# Altium PCB DEV-5V-Outside-Pump_2024-03-23.pcbdoc
Units mil, origin at the board's own origin, x right, y up, seen from the top; angles counter-clockwise.
Board outline 4264.35 x 3965 mil, 2 copper layers (Top Layer, Bottom Layer); 65 components, 44 nets, 268 pads, 44 vias.
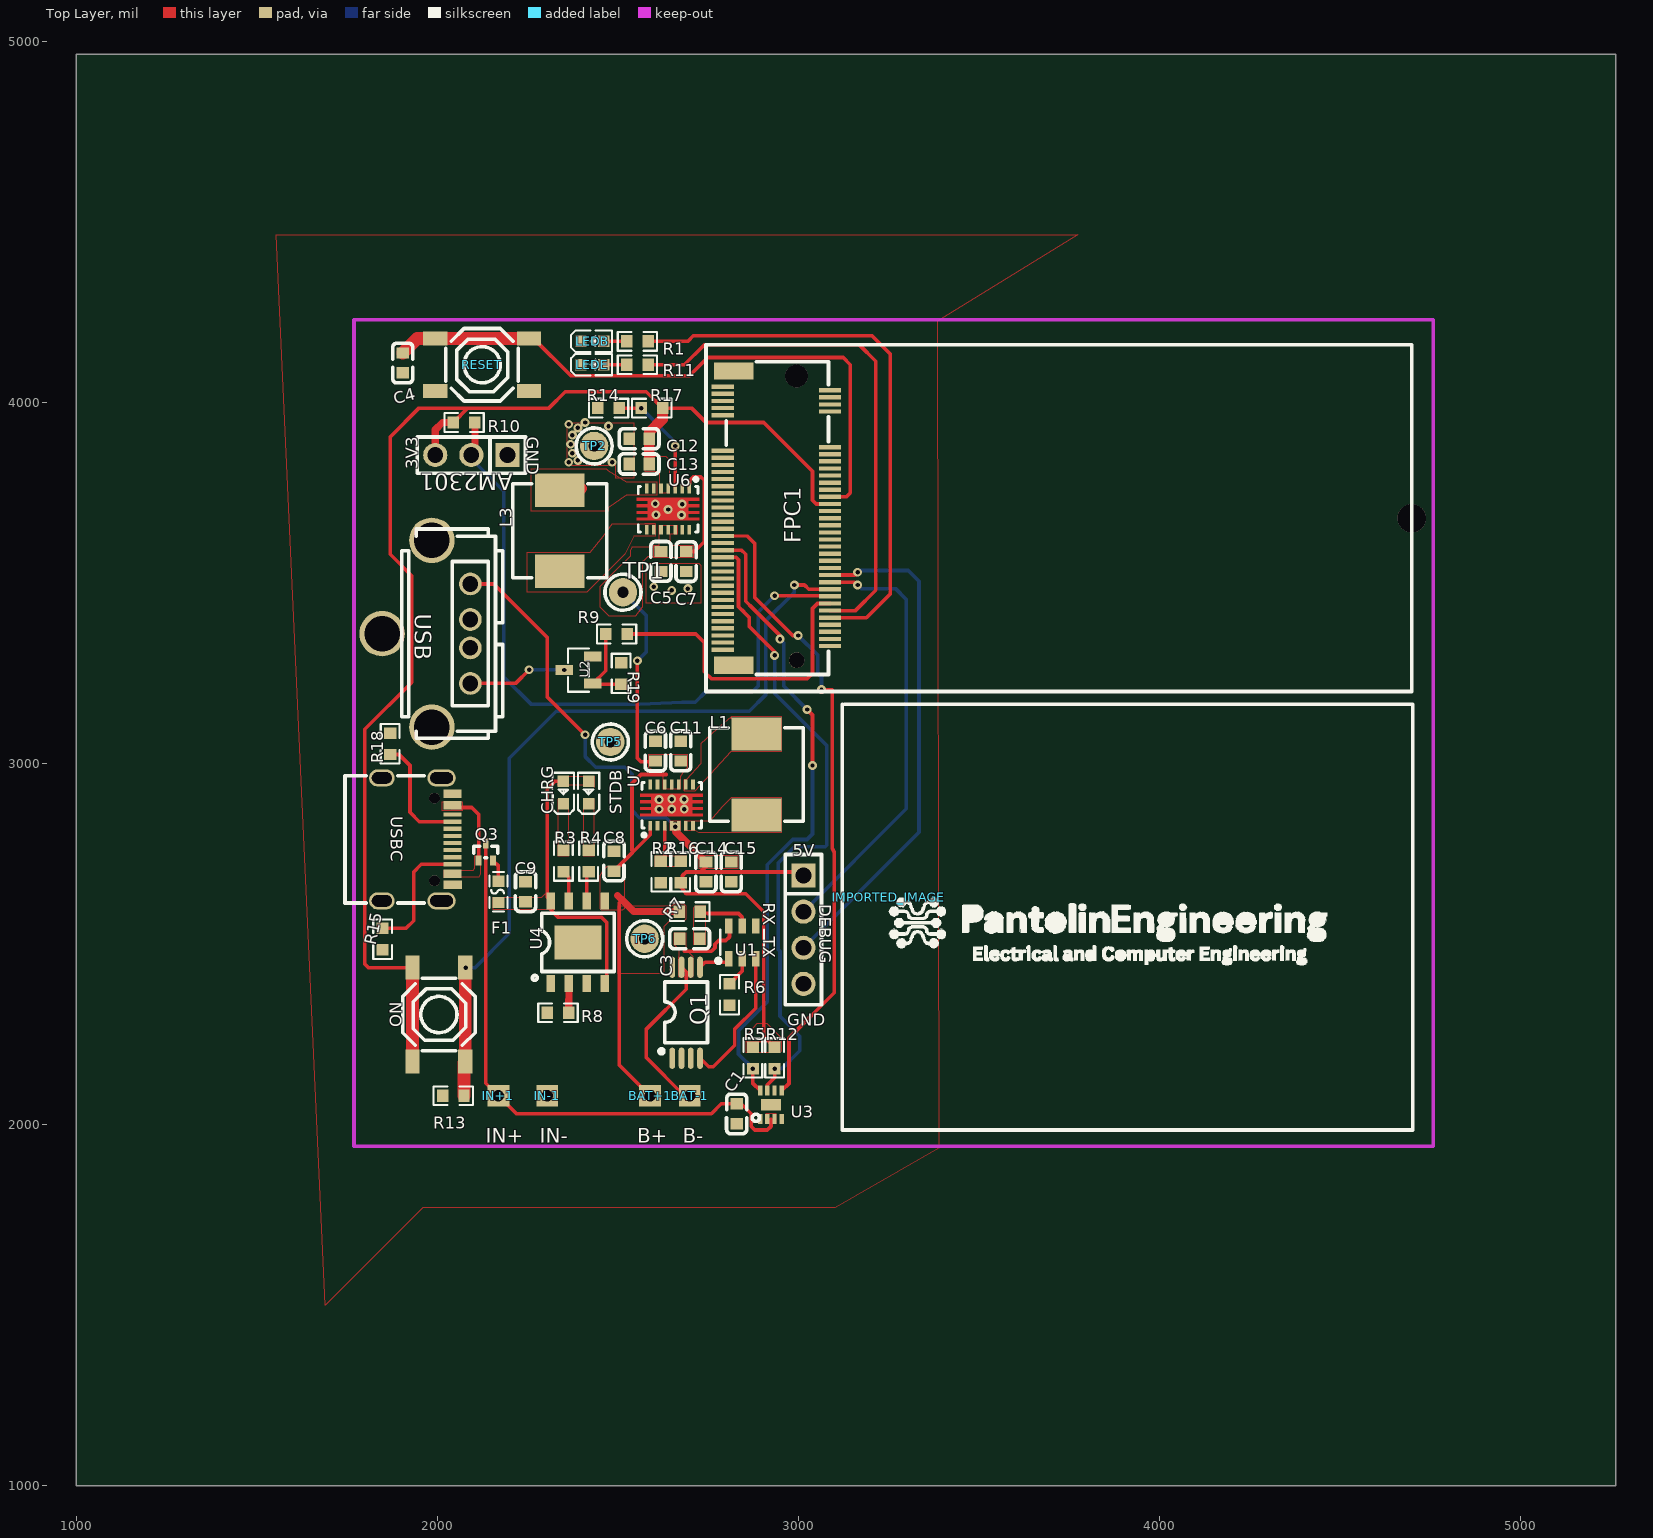
[diagram p0: Top Layer view]
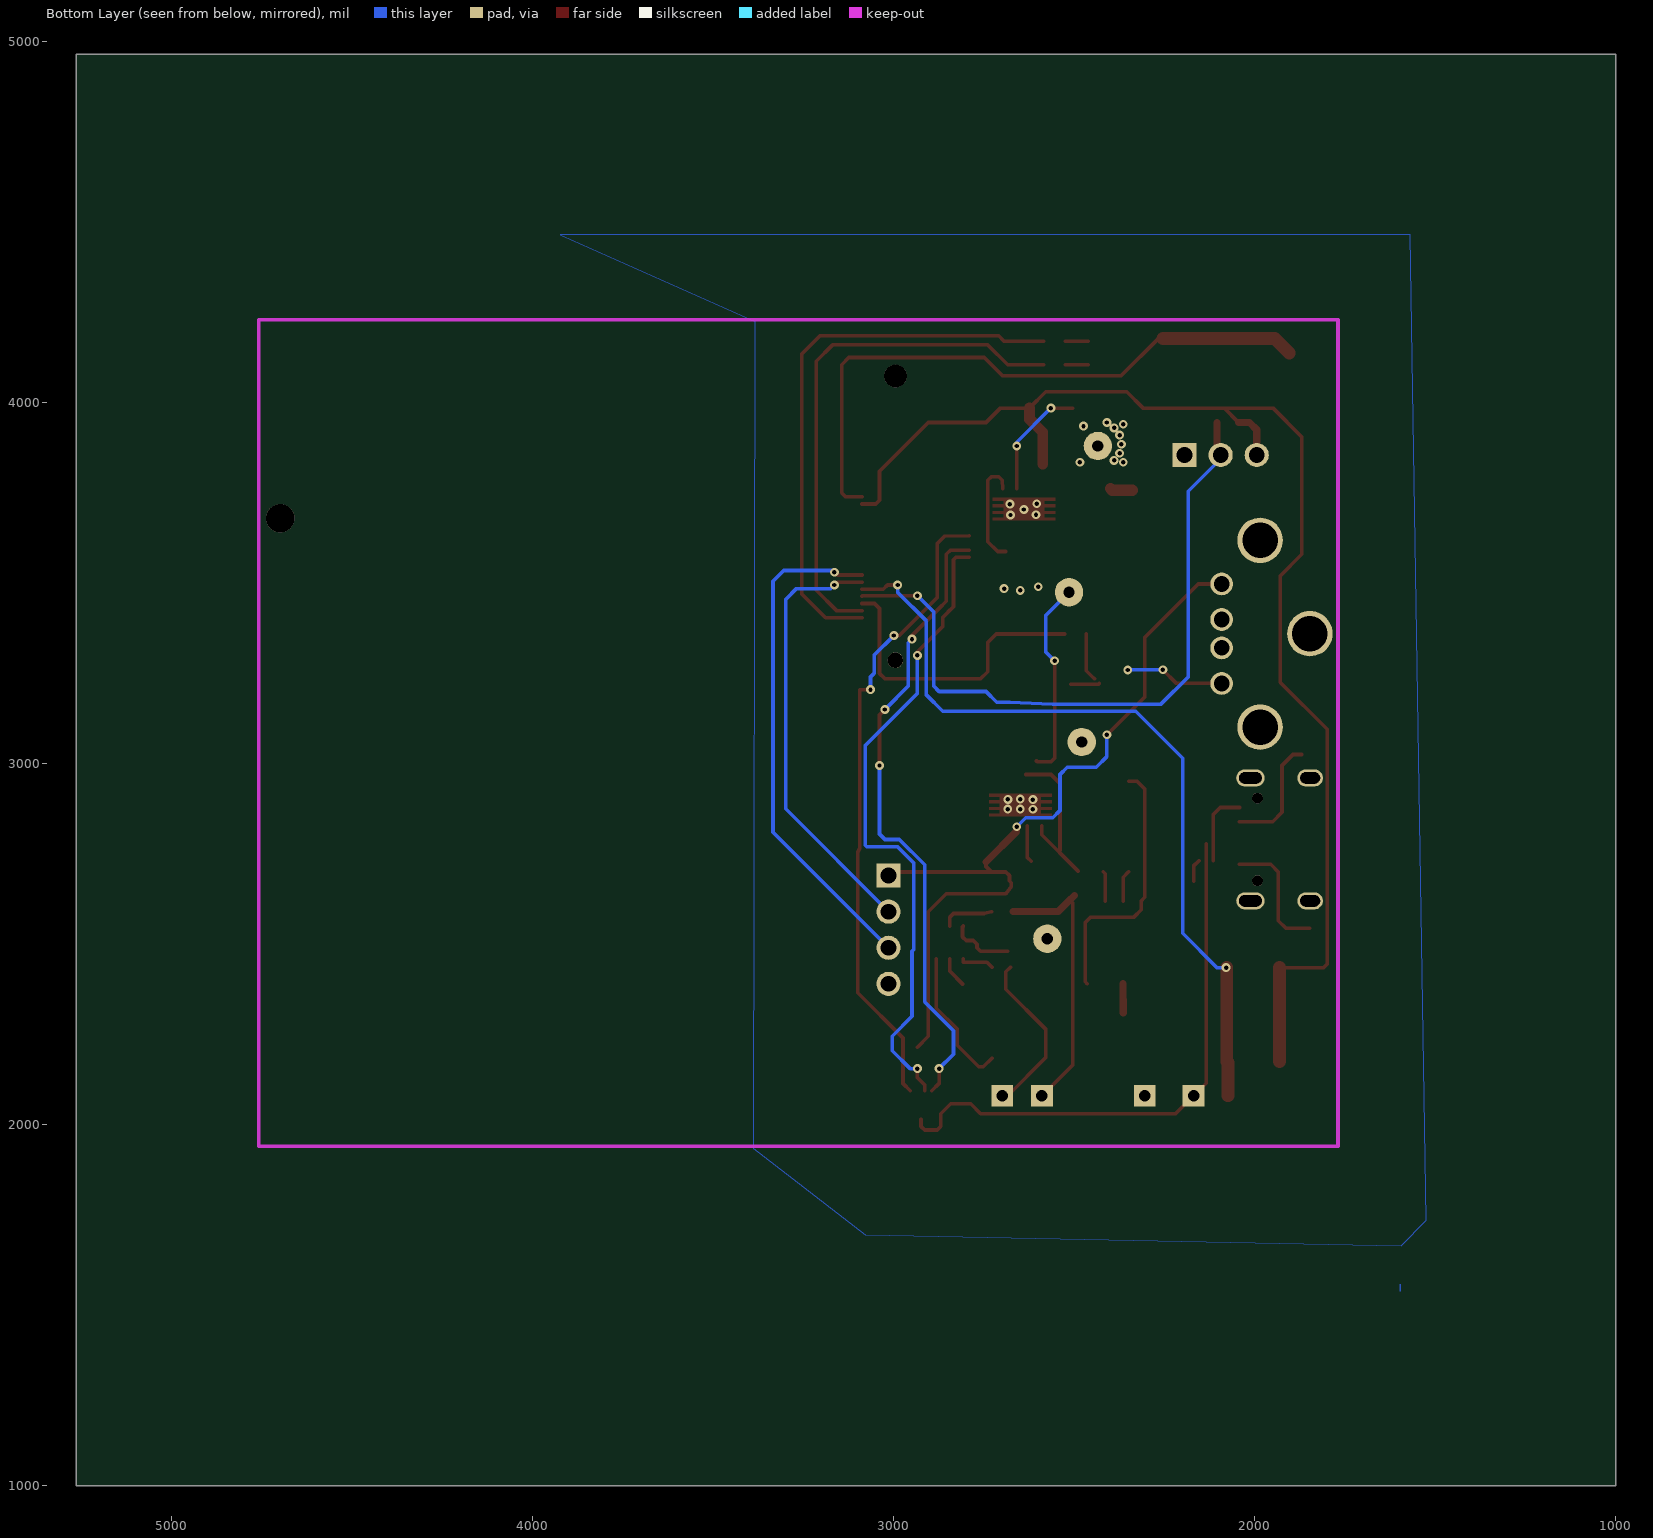
[diagram p1: Bottom Layer view, seen from below]

## Layer stack, top to bottom
Top Layer: signal copper (thickness not stored)
Dielectric: dielectric 12.6, FR-4, Dk 4.8
Bottom Layer: signal copper (thickness not stored)

## Board outline
5264.35,1000 1000,1000 1000,4965 5264.35,4965

## Components (designator, comment, footprint, x,y, rotation, side; value= is the part's Value field where it differs from the comment)
AM2301 "1125" CONN-TH_1125-1103S0S113CR01 2094.35,3855 r180 top
BAT+1 "Pad 04" CON_PAD_SQUARE_32MIL 2589.35,2080 r0 top
BAT-1 "Pad 05" CON_PAD_SQUARE_32MIL 2699.35,2080 r0 top
C1 "100n" C0603 2829.35,2030 r90 top
C3 "100n" C0603 2699.35,2515 r0 top
C4 "100n" C0603 1904.35,4110 r90 top
C5 "100n" C0603 2619.35,3560 r270 top
C6 "100n" C0603 2604.35,3035 r90 top
C7 "10u" C0603 2689.35,3560 r90 top
C8 "10u" C0603 2489.35,2730 r270 top
C9 "10u" C0603 2244.35,2645 r270 top
C11 "10uF" C0603 2674.35,3035 r270 top
C12 "22u" C0603 2559.35,3900 r0 top
C13 "22u" C0603 2559.35,3830 r0 top
C14 "22u" C0603 2744.35,2700 r90 top
C15 "22u" C0603 2814.35,2700 r90 top
CHRG "FC-DA1608BK-470H10" LED0603-RD 2349.35,2920 r90 top
DEBUG "2.54-1*4P母" HDR-TH_4P-P2.54-V-F 3014.35,2540 r270 top
F1 "1.25A" F0603 2169.35,2645 r270 top
FPC1 "AS0BC21-S30BM-7H" CONN-SMD_AS0BC21-S30BM-7H 2939.35,3680 r90 top
IMPORTED_IMAGE "IMPORTED_IMAGE" IMPORTED_IMAGE 3250.82,2630.26 r0 top
IN+1 "Pad 01" CON_PAD_SQUARE_32MIL 2169.35,2080 r0 top
IN-1 "Pad 02" CON_PAD_SQUARE_32MIL 2304.35,2080 r0 top
L1 "1.5u" IND-SMD_L7.2-W6.6_GPSR0730 2884.31,2970 r90 top
L3 "1.5uH" IND-SMD_L7.2-W6.6_GPSR0730 2339.35,3645 r270 top
LEDB "FC-DA1608BK-470H10" LED0603-RD 2429.38,4169.98 r0 top
LEDE "XL-1608UGC-04" LED0603-RD_GREEN 2429.36,4105.04 r0 top
ON "TS-1187A-B-A-B" SW-SMD_4P-L5.1-W5.1-P3.70-LS6.5-TL-2 2004.35,2305 r90 top
Q1 "FS8205A" TSSOP-8_L4.4-W3.5-P0.65-LS6.4-BL 2689.35,2310 r0 top
Q3 "NTA4151PT1G" SOT-416_L1.6-W0.8-P1.00-LS1.6-BR 2134.35,2755 r270 top
R1 "49.9" R0603 2554.35,4170 r0 top
R2 "180k" R0603 2619.35,2700 r90 top
R3 "1k" R0603 2349.35,2730 r270 top
R4 "1k" R0603 2419.35,2730 r270 top
R5 "10k" R0603 2874.35,2185 r90 top
R6 "1k" R0603 2809.35,2360 r270 top
R7 "100" R0603 2699.35,2590 r180 top
R8 "1.6k" R0603 2334.35,2310 r0 top
R9 "10k" R0603 2496.62,3359.21 r180 top
R10 "10k" R0603 2074.35,3945 r180 top
R11 "49.9" R0603 2554.35,4105 r0 top
R12 "10k" R0603 2934.35,2185 r90 top
R13 "430" R0603 2044.35,2080 r0 top
R14 "180k" R0603 2474.35,3985 r0 top
R15 "5.1kΩ" R0603 1848.38,2513.82 r90 top
R16 "1.6M" R0603 2674.35,2700 r90 top
R17 "1M" R0603 2594.35,3985 r180 top
R18 "5.1kΩ" R0603 1869.35,3055 r270 top
R19 "10k" R0603 2509.35,3250 r270 top
RESET "TS-1187A-B-A-B" SW-SMD_4P-L5.1-W5.1-P3.70-LS6.5-TL-2 2124.35,4105 r0 top
STDB "FC-DA1608HRK-620D" LED0603-RD_RED 2419.32,2920.04 r90 top
TP1 "VIN" PKG-TEST-POINT-PTH-1X1 2514.35,3475 r0 top
TP2 "GND" PKG-TEST-POINT-PTH-1X1 2434.35,3880 r0 top
TP5 "GND" PKG-TEST-POINT-PTH-1X1 2479.35,3060 r0 top
TP6 "VIN" PKG-TEST-POINT-PTH-1X1 2574.35,2515 r0 top
U1 "DW01A" SOT-23-6_L2.9-W1.6-P0.95-LS2.8-BL 2844.35,2505 r0 top
U2 "IRLML6244TR" SOT-23-3_L2.9-W1.3-P1.90-LS2.4-BR 2390.97,3259.31 r0 top
U3 "MAX17048" DFN-8 2924.35,2055 r0 top
U4 "TP4056" ESOP-8_L4.9-W3.9-P1.27-LS6.0-BL-EP 2389.35,2505.05 r0 top
U6 "TPS63020DSJR" VSON-14_L4.0-W3.0-P0.50-BL-EP_TI_DSJ 2639.35,3705 r180 top
U7 "TPS63020DSJR" VSON-14_L4.0-W3.0-P0.50-BL-EP_TI_DSJ 2649.35,2885 r0 top
USB "UBAS-4R-D14D-4D(LF)(SN)" USB-A-TH_UBAS-4R-D14D-4D-LF-SN 1969.35,3360 r270 top
USBC "TYPE-C-31-M-12" USB-C_SMD-TYPE-C-31-M-12 1944.34,2790.03 r270 top
? "" ? 3264.35,1771.62 r0 top
? "" ? 1635.67,3085 r0 top

## Footprints (in the part's own frame and the unit in brackets; to place one, negate y for a bottom-side part, rotate by r counter-clockwise, add the part's x,y. Pads: shape width x height; smd on the part's side, far side on the other; paste and mask are expansions set on the pad)
C0603 [mm]
  rect 0.8x0.9 smd paste+0 mask+0.051: 1(-0.7,0) 2(0.7,0)
  silkscreen extent -1.41,-0.71 1.39,0.72
CON_PAD_SQUARE_32MIL [mil]
  rect 60x60 hole 32 paste+0 mask+2: P(0,0)
CONN-SMD_AS0BC21-S30BM-7H [mm]
  rect 0.3x1.55 smd paste+0 mask+0.05: 1(9.25,3.775) 2(9,-3.775) 3(8.75,3.775) 4(8.5,-3.775) 5(8.25,3.775) 6(8,-3.775) 7(7.75,3.775) 8(7.5,-3.775) 9(7.25,3.775) 18(5,-3.775) 19(4.75,3.775) 20(4.5,-3.775) 21(4.25,3.775) 22(4,-3.775) 23(3.75,3.775) 24(3.5,-3.775) 25(3.25,3.775) 26(3,-3.775) 27(2.75,3.775) 28(2.5,-3.775) 29(2.25,3.775) 30(2,-3.775) 31(1.75,3.775) 32(1.5,-3.775) 33(1.25,3.775) 34(1,-3.775) 35(0.75,3.775) 36(0.5,-3.775) 37(0.25,3.775) 38(0,-3.775) 39(-0.25,3.775) 40(-0.5,-3.775) 41(-0.75,3.775) 42(-1,-3.775) 43(-1.25,3.775) 44(-1.5,-3.775) 45(-1.75,3.775) 46(-2,-3.775) 47(-2.25,3.775) 48(-2.5,-3.775) 49(-2.75,3.775) 50(-3,-3.775) 51(-3.25,3.775) 52(-3.5,-3.775) 53(-3.75,3.775) 54(-4,-3.775) 55(-4.25,3.775) 56(-4.5,-3.775) 57(-4.75,3.775) 58(-5,-3.775) 59(-5.25,3.775) 60(-5.5,-3.775) 61(-5.75,3.775) 62(-6,-3.775) 63(-6.25,3.775) 64(-6.5,-3.775) 65(-6.75,3.775) 66(-7,-3.775) 67(-7.25,3.775) 68(-7.5,-3.775) 69(-7.75,3.775) 70(-8,-3.775) 71(-8.25,3.775) 72(-8.5,-3.775) 73(-8.75,3.775) 74(-9,-3.775) 75(-9.25,3.775)
  rect 1.2x2.75 smd paste+0 mask+0.05: 76(-10.35,3) 77(10.35,3)
  round 1.1 hole 1.1 unplated paste+0: ""(-10,-1.42)
  round 1.6 hole 1.6 unplated paste+0: ""(10,-1.42)
  silkscreen extent -11,-3.67 11,3.53
CONN-TH_1125-1103S0S113CR01 [mm]
  rect 1.7x1.7 hole 1.1 paste+0 mask+0.05: 1(-2.54,0)
  round 1.7 hole 1.1 paste+0 mask+0.05: 2(0,0) 3(2.54,0)
  silkscreen extent -3.81,-1.27 3.81,1.27
DFN-8 [mil]
  rect 11.8x27.6 smd paste+0 mask+2: P$1(-30,-39) P$2(-10,-39) P$3(10,-39) P$4(30,-39) P$5(30,39) P$6(10,39) P$7(-10,39) P$8(-30,39)
  rect 54.3x31.5 smd paste+0 mask+2: P$9(0,0)
  silkscreen extent -52,-46 -32,-26
ESOP-8_L4.9-W3.9-P1.27-LS6.0-BL-EP [mm]
  rect 0.6x1.2 smd paste+0 mask+0.051: 1(-1.905,-2.908) 2(-0.635,-2.908) 3(0.635,-2.908) 4(1.905,-2.908) 5(1.905,2.908) 6(0.635,2.908) 7(-0.635,2.908) 8(-1.905,2.908)
  rect 3.3x2.4 smd paste+0 mask+0.051: 9(0,0)
  silkscreen extent -3.2,-2.67 2.55,2.05
F0603 [mil]
  rect 31.75x34.02 smd paste-3937.01 mask+2: 1(-29.66,0) 2(29.66,0)
  silkscreen extent -55,-25 55,25
HDR-TH_4P-P2.54-V-F [mm]
  rect 1.7x1.7 hole 1.1 paste+0 mask+0.051: 1(-3.81,0)
  round 1.7 hole 1.1 paste+0 mask+0.051: 2(-1.27,0) 3(1.27,0) 4(3.81,0)
  silkscreen extent -5.29,-1.27 5.29,1.27
IMPORTED_IMAGE [mil]
  silkscreen extent 0,-189 1215,0
IND-SMD_L7.2-W6.6_GPSR0730 [mm]
  rect 2.35x3.5 smd paste+0 mask+0.051: 1(-2.85,0) 2(2.85,0)
  silkscreen extent -3.3,-3.3 3.3,3.3
LED0603-RD [mm]
  rect 0.8x0.8 smd paste+0 mask+0.051: 1(-0.799,-0.003) 2(0.799,0.004)
  silkscreen extent -1.49,-0.75 1.39,0.76
LED0603-RD_GREEN [mm]
  rect 0.8x0.8 smd paste+0 mask+0.051: 1(-0.799,-0.003) 2(0.799,0.004)
  silkscreen extent -1.49,-0.75 1.39,0.76
LED0603-RD_RED [mm]
  rect 0.8x0.8 smd paste+0 mask+0.051: 1(-0.799,-0.003) 2(0.799,0.004)
  silkscreen extent -1.49,-0.75 1.39,0.76
PKG-TEST-POINT-PTH-1X1 [mm]
  round 2 hole 0.8 paste+0 mask+0.102: 1(0,0)
  silkscreen extent -1.27,-1.27 1.27,1.27
R0603 [mil]
  rect 31.75x34.02 smd paste-3937.01 mask+2: 1(-29.65,0) 2(29.66,0)
  silkscreen extent -55,-26 55,26
SOT-23-3_L2.9-W1.3-P1.90-LS2.4-BR [mm]
  rect 1.25x0.7 smd paste+0 mask+0.051: 1(1,-0.95) 2(1,0.95) 3(-1,0)
  silkscreen extent -0.73,-1.53 0.73,1.53
SOT-23-6_L2.9-W1.6-P0.95-LS2.8-BL [mm]
  rect 0.532x1.072 smd paste+0 mask+0.051: 1(-0.95,-1.149) 2(0,-1.149) 3(0.95,-1.149) 4(0.95,1.149) 5(0,1.149) 6(-0.95,1.149)
  silkscreen extent -1.82,-1.45 1.54,0.89
SOT-416_L1.6-W0.8-P1.00-LS1.6-BR [mm]
  rect 0.7x0.4 smd paste+0 mask+0.051: 1(0.6,-0.508) 2(0.6,0.508) 3(-0.6,0)
  silkscreen extent -0.4,-0.85 0.4,0.85
SW-SMD_4P-L5.1-W5.1-P3.70-LS6.5-TL-2 [mm]
  rect 1.7x1 smd paste+0 mask+0.051: 1(-3.3,1.85) 2(3.3,1.85) 3(-3.3,-1.85) 4(3.3,-1.85)
  silkscreen extent -2.55,-2.55 2.55,2.55
TSSOP-8_L4.4-W3.5-P0.65-LS6.4-BL [mm]
  oval 0.4x1.5 smd paste+0 mask+0.051: 1(-0.975,-3.2) 2(-0.325,-3.2) 3(0.325,-3.2) 4(0.975,-3.2) 5(0.975,3.2) 6(0.325,3.2) 7(-0.325,3.2) 8(-0.975,3.2)
  silkscreen extent -1.89,-2.87 1.5,2.16
USB-A-TH_UBAS-4R-D14D-4D-LF-SN [mm]
  round 1.6 hole 1.1 paste+0 mask+0.051: 1(-3.5,3.105) 2(-1,3.105) 3(1,3.105) 4(3.5,3.105)
  round 3.2 hole 2.5 paste+0 mask+0.051: 5(-6.57,0.395) 6(6.57,0.395) 7(0,-3.105)
  silkscreen extent -7.37,-1.73 7.37,5.38
USB-C_SMD-TYPE-C-31-M-12 [mm]
  oval 1.2x2 hole 0.8 slot 1.6 at 90 deg paste+0 mask+0.051: 0(-4.325,1.716) 1(4.325,1.716)
  oval 1.2x1.8 hole 0.8 slot 1.4 at 90 deg paste+0 mask+0.051: 2(4.325,-2.484) 3(-4.325,-2.484)
  rect 0.3x1.3 smd paste-100 mask+0.051: A1(-3.35,2.484) A4(-2.55,2.484) A5(-1.25,2.484) A6(-0.25,2.484) A7(0.25,2.484) A8(1.25,2.484) A9(2.55,2.484) A12(3.35,2.484) B1(3.05,2.484) B4(2.25,2.484) B5(1.75,2.484) B6(0.75,2.484) B7(-0.75,2.484) B8(-1.75,2.484) B9(-2.25,2.484) B12(-3.05,2.484)
  round 0.75 hole 0.75 unplated paste+0: ""(-2.9,1.216) ""(2.9,1.216)
  silkscreen extent -4.47,-5.08 4.47,0.5
VSON-14_L4.0-W3.0-P0.50-BL-EP_TI_DSJ [mm]
  rect 0.25x0.7 smd paste+0 mask+0.051: 1(-1.5,-1.45) 2(-1,-1.45) 3(-0.5,-1.45) 4(0,-1.45) 5(0.5,-1.45) 6(1,-1.45) 7(1.5,-1.45) 8(1.5,1.45) 9(1,1.45) 10(0.5,1.45) 11(0,1.45) 12(-0.5,1.45) 13(-1,1.45) 14(-1.5,1.45)
  Top Layer region: -2.2,0.79 -2.2,0.59 -1.43,0.59 -1.43,0.33 -2.2,0.33 -2.2,0.13 -1.43,0.13 -1.43,-0.13 -2.2,-0.13 -2.2,-0.33 -1.43,-0.33 -1.43,-0.59 -2.2,-0.59 -2.2,-0.79 2.2,-0.79 2.2,-0.59 1.43,-0.59 1.43,-0.33 2.2,-0.33 2.2,-0.13 1.43,-0.13 1.43,0.13 2.2,0.13 2.2,0.33 1.43,0.33 1.43,0.59 2.2,0.59 2.2,0.79
  silkscreen extent -2.1,-2.23 2.1,1.6
? [mil]

## Free pads (board coordinates)
  round 78.74 hole 78.74 unplated paste+0: ""(4699.35,3680)

## Via types
v1: diameter 24.41, hole 12.2, Top Layer to Bottom Layer, tented both sides, 44 vias

## Nets (pads, with @x,y where several pads share a name; then routed paths per layer and width w, separated by ;. In a path a pad name is that pad's centre, name@x,y a point inside that pad or via, vN(x,y) a via of type N, cw(c..) or ccw(c..) an arc to the next point about the centre after c; other vN are vias at no path point)
+3V3: AM2301.3 C12.2 C13.2 FPC1.34 ON.1 ON.2 R10.2 R17.1 U6.4 U6.5 | length 3736.3
  Top Layer w10: ON.2@1931.55,2434.9 1809.45,2434.9 1799.35,2445 1799.35,3095 1929.35,3225 1929.35,3520 1869.35,3580 1869.35,3905 1949.35,3985 2084.65,3985 ; R10.2@2044.65,3945 2084.65,3985 ; R17.1 2704.35,3985 2744.35,3945 2904.35,3945 3039.35,3810 3039.35,3730 3049.98,3719.37 FPC1.34 ; R17.1 2579.05,4030 2354.35,4030 2309.35,3985 2084.65,3985
  Top Layer w19.68: AM2301.3 1994.35,3925 2014.35,3945 R10.2
  Top Layer w29.53: C13.2 C12.2 ; C12.2@2587.35,3900 2587.35,3918.2 2623.95,3954.5 R17.1
  Top Layer w35.43: ON.1 ON.2
+5V: C14.2 C15.2 DEBUG.1 R5.2 R12.2 R16.1 U7.4 U7.5 USB.1 | length 2227
  Top Layer w10: USB.1 2156.55,3497.8 2304.65,3349.7 2304.65,3184.7 v1(2409.35,3080) ; C14.2 2744.35,2715 2729.35,2700 ; R12.2 2904.35,2244.7 2904.35,2590 2854.35,2640 2689.35,2640 2674.35,2660 R16.1 2679.35,2675.3 2679.35,2690 2689.35,2700 2708.15,2700 2729.35,2700 ; DEBUG.1 3004.35,2700 2729.35,2700
  Top Layer w19.68: v1(2659.35,2825) 2659.35,2812.56 C14.2
  Bottom Layer w10: v1(2409.35,3080) 2409.35,3020 2439.35,2990 2519.35,2990 2539.35,2970 2539.35,2870 2559.35,2850 2634.35,2850 v1(2659.35,2825)
AM: AM2301.2 FPC1.60 R10.1 | length 1924
  Top Layer w10: v1(2934.35,3465) 3086.44,3465 FPC1.60
  Top Layer w19.68: AM2301.2 2104.01,3864.66 R10.1
  Bottom Layer w10: AM2301.2 2094.35,3845 2184.35,3755 2184.35,3240 2259.35,3165 2559.35,3165 2679.35,3170 2714.35,3170 2744.35,3200 2874.35,3200 2889.35,3215 2889.35,3420 v1(2934.35,3465)
BATT_ALERT: FPC1.43 U3.P$5 | length 1789.5
  Top Layer w10: FPC1.43@2790.75,3630.8 2859.35,3630 2879.35,3610 2879.35,3460 2984.35,3355 v1(2999.35,3355) ; U3.P$5 2974.35,2114 2974.35,2240 3099.35,2365 3099.35,2755 3094.35,2765 3094.35,3205 v1(3064.35,3205)
  Bottom Layer w10: v1(2999.35,3355) 3054.35,3300 3054.35,3250 3064.35,3240 v1(3064.35,3205)
C3_1: BAT-1.P C3.1 Q1.6 Q1.7 U1.6 | length 644
  Top Layer w10: Q1.7 2689.35,2423.2 2689.35,2375 2579.35,2265 2579.35,2185 2684.35,2080 BAT-1.P ; 2684.35,2480 2739.35,2480 2759.35,2480 2769.35,2490 2769.35,2500 2779.35,2510 2799.35,2510 2809.35,2520 2809.35,2547.84 U1.6@2806.95,2550.24
C3_2: C3.2 R7.1 U1.5 | length 144.8
  Top Layer w10: R7.1 2749.35,2585 2834.35,2585 2844.35,2575 U1.5
C9_2: C9.2 CHRG.2 F1.2 STDB.2 U4.4 U4.8 | length 733.9
  Top Layer w10: U4.8 2314.35,2595 2334.35,2575 2454.35,2575 2469.35,2560 2469.35,2395.55 U4.4 ; U4.8 2304.35,2629.6 2304.35,2930 2325.85,2951.5 CHRG.2
CC1: R18.2 USBC.A5 | length 326
  Top Layer w10: R18.2 1894.01,3025.34 1924.35,2995 1924.35,2865 1950.11,2839.24 USBC.A5
CC2: R15.2 USBC.B5 | length 346.4
  Top Layer w10: R15.2 1912.85,2543.5 1934.35,2565 1934.35,2700 1955.45,2721.1 USBC.B5@2042.15,2721.1
EN: C4.2 FPC1.32 RESET.1 RESET.2 | length 1744.2
  Top Layer w10: RESET.2@2254.25,4177.8 2266.55,4177.8 2369.35,4075 2699.35,4075 2749.35,4125 3124.35,4125 3144.35,4105 3144.35,3750 3133.45,3739.1 FPC1.32
  Top Layer w35.43: C4.2 1944.63,4177.84 RESET.1 RESET.2
F1_1: F1.1 Q3.2 | length 62.9
  Top Layer w10: Q3.2 2169.35,2716.38 F1.1
GND: AM2301.1 C1.1 C4.1 C5.2 C6.2 C7.1 C8.1 C9.1 C11.1 C12.1 C13.1 C14.1 C15.1 DEBUG.4 FPC1.23 IN-1.P LEDB.1 LEDE.1 Q1.2 Q1.3 R2.1 R6.2 R8.1 R13.1 R14.1 R15.1 R18.1 R19.1 RESET.3 RESET.4 TP2.1 TP5.1 U2.2 U3.P$1 U3.P$4 U3.P$6 U3.P$9 U4.1 U4.3 U6.2 U6.13 U7.2 U7.13 USBC.0 USBC.1 USBC.2 USBC.3 USBC.A1 USBC.A12 USBC.B1 USBC.B12
  other v1: 2614.57,2873.92 2649.6,2874.12 2683.98,2874.21 2614.41,2900.37 2683.82,2901.11 2649.53,2901.67 2649.35,3480 2694.35,3485 2599.35,3490 2605.93,3689.45 2676.45,3688.93 2639.35,3703.93 2678.03,3718.93 2603.56,3719.98 2364.35,3835 2484.35,3835 2389.35,3840 2374.35,3860 2369.35,3885 2374.35,3910 2389.35,3930 2474.35,3935 2364.35,3940 2409.35,3945
GPIO38: FPC1.66 R1.2 | length 1555.8
  Top Layer w10: R1.2 2694.35,4170 2709.35,4185 3204.35,4185 3254.35,4135 3254.35,3470 3188.75,3404.4 FPC1.66
GPIO39: FPC1.64 R11.2 | length 1456.3
  Top Layer w10: R11.2 2684.35,4105 2739.35,4160 3169.35,4160 3214.35,4115 3214.35,3480 3158.45,3424.1 FPC1.64
LEDB_2: LEDB.2 R1.1 | length 63.8
  Top Layer w10: LEDB.2@2460.85,4170.11 R1.1
LEDE_2: LEDE.2 R11.1 | length 63.9
  Top Layer w10: LEDE.2 R11.1
OC: Q1.4 U1.3 | length 394.9
  Top Layer w10: Q1.4 2751.76,2160 2764.35,2160 2824.35,2220 2824.35,2265 2881.75,2322.4 U1.3
OD: Q1.5 U1.1 | length 94.8
  Top Layer w10: Q1.5 2741.75,2450 2806.95,2450 U1.1@2806.95,2459.8
P+: C1.2 IN+1.P Q3.3 U3.P$2 U3.P$3 | length 1575
  Top Layer w10: Q3.3 2134.35,2115 IN+1.P 2219.35,2030 2759.35,2030 2786.91,2057.56 C1.2 ; C1.2 2841.75,2057.6 2869.35,2030 2869.35,1995 2879.35,1985 2914.35,1985 2924.35,1995 2924.35,2015
PUMP: FPC1.58 ON.3 ON.4 R13.2 | length 2227
  Top Layer w10: ON.4 2077.27,2435 v1(2079.35,2435) ; v1(2989.35,3495) 3017.05,3495 3028.85,3483.1 FPC1.58@3087.95,3483.1
  Top Layer w35.43: R13.2 2074.01,2171.9 ON.3 ON.4
  Bottom Layer w10: v1(2079.35,2435) 2104.35,2435 2199.35,2530 2199.35,3015 2329.35,3145 2864.35,3145 2909.35,3190 2909.35,3395 2989.35,3475 v1(2989.35,3495)
R3_1: CHRG.1 R3.1
R3_2: R3.2 U4.7 | length 87.1
  Top Layer w10: R3.2@2349.35,2700.39 2364.35,2685.39 U4.7
R6_1: R6.1 U1.2 | length 84.6
  Top Layer w10: R6.1 2844.35,2424.66 U1.2
R8_2: R8.2 U4.2 | length 80.5
  Top Layer w19.68: R8.2 U4.2@2364.35,2390.5
S$22309: 
S$22319: 
S$22602: 
SCL: FPC1.49 R12.1 U3.P$7 | length 1802
  Top Layer w10: FPC1.49 2827.61,3571.74 2834.35,3565 2834.35,3435 2849.35,3420 ; 2846.95,3422.4 2864.35,3405 2864.35,3380 2934.35,3310 v1(2934.35,3300) ; U3.P$7 2914.35,2110 2934.35,2130 v1(2934.35,2155.34)
  Bottom Layer w10: v1(2934.35,2155.34) 2954.69,2155.34 3004.35,2205 3004.35,2245 2949.35,2300 2949.35,2480 2944.35,2485 2944.35,2725 2989.35,2770 3074.35,2770 3079.35,2775 3079.35,3050 2934.35,3195 v1(2934.35,3300)
SDA: FPC1.47 R5.1 U3.P$8 | length 1764.2
  Top Layer w10: FPC1.47 2842.93,3591.42 2854.35,3580 2854.35,3450 2874.35,3430 2949.35,3355 v1(2949.35,3345) ; v1(2874.35,2155.34) 2874.35,2114 U3.P$8 ; v1(3024.35,3150) 3039.35,3135 v1(3039.35,2995)
  Bottom Layer w10: v1(2874.35,2155.34) 2834.35,2195.3 2834.35,2260 2914.35,2340 2914.35,2720 2984.35,2790 3024.35,2790 3032.65,2798.3 3039.35,2805 v1(3039.35,2995) ; v1(2949.35,3345) 2959.35,3335 2959.35,3215 v1(3024.35,3150)
STDB_1: R4.1 STDB.1
U0RXD: DEBUG.2 FPC1.56 | length 1214.2
  Top Layer w10: FPC1.56 3156.51,3502.84 v1(3164.35,3495)
  Bottom Layer w10: DEBUG.2 3299.35,2875 3299.35,3410 3299.35,3455 3269.35,3485 3174.35,3485 v1(3164.35,3495)
U0TXD: DEBUG.3 FPC1.54 | length 1411.5
  Top Layer w10: FPC1.54 3156.87,3522.52 v1(3164.35,3530)
  Bottom Layer w10: DEBUG.3 3334.35,2810 3334.35,3420 3334.35,3505 3304.35,3535 3169.35,3535 v1(3164.35,3530)
U2_1: R9.2 R19.2 U2.1 | length 213.4
  Top Layer w10: U2.1 2431.91,3220.34 R19.2 ; U2.1@2443.77,3235.34 2452.65,3243.3 2466.95,3257.6 R9.2
U4_6: R4.2 U4.6 | length 82.9
  Top Layer w10: U4.6 2414.35,2695.34 R4.2
U6_3: R14.2 R17.2 U6.3 | length 322.8
  Top Layer w10: R14.2 v1(2564.69,3985) ; U6.3 v1(2659.35,3880)
  Bottom Layer w10: v1(2564.69,3985) 2659.35,3890.34 v1(2659.35,3880)
U6_6: L3.1 U6.6 U6.7 | length 62
  Top Layer w31.5: L3.1 2394.46,3757.21 L3.1@2399.35,3762.1
U6_8: L3.2 U6.8 U6.9
U7_3: R2.2 R16.2 U7.3 | length 102.5
  Top Layer w10: R2.2 2629.67,2739.98 U7.3
U7_6: L1.1 U7.6 U7.7
U7_8: L1.2 U7.8 U7.9
USB_4: U2.3 USB.4 | length 275.6
  Top Layer w10: USB.4 2216.55,3222.2 v1(2254.35,3260)
  Bottom Layer w10: v1(2254.35,3260) v1(2351.6,3259.31)
USB_5V: Q3.1 USBC.A4 USBC.A9 USBC.B4 USBC.B9 | length 208.5
  Top Layer w10: USBC.B9 2095.74,2878.61 2114.35,2860 Q3.1
VBAT: BAT+1.P C5.1 C6.1 C7.2 C8.2 C11.2 R7.2 TP1.1 TP6.1 U4.5 U6.1 U6.10 U6.11 U6.12 U7.1 U7.10 U7.11 U7.12 | length 2079.1
  Top Layer w10: C8.2 2590.29,2803.38 U7.1 ; 2504.35,2615 2504.35,2580 2504.35,2165 BAT+1.P ; 2539.52,2752.61 2539.35,2762.79 2539.35,2945 2564.35,2970 2634.35,2970 ; v1(2554.35,3285) 2554.35,3015 2564.35,3005 2601.95,3005 C6.1 ; C7.2 2711.95,3587.6 2739.35,3615 2739.35,3785 2729.35,3795 2709.35,3795 2699.35,3785 U6.1
  Top Layer w19.68: 2499.35,2635 2514.35,2620 2544.35,2590 R7.2@2669.65,2590
  Bottom Layer w10: TP1.1 2579.35,3410 2579.35,3310 v1(2554.35,3285)
WTR: FPC1.62 R9.1 | length 852.4
  Top Layer w10: R9.1@2526.25,3359.2 2715.95,3359.2 2739.35,3335.7 2739.35,3255 2759.35,3235 3024.35,3235 3039.35,3250 3039.35,3430 3053.15,3443.8 FPC1.62
pads on no net: FPC1. FPC1.1 FPC1.2 FPC1.3 FPC1.4 FPC1.5 FPC1.6 FPC1.7 FPC1.8 FPC1.9 FPC1.18 FPC1.19 FPC1.20 FPC1.21 FPC1.22 FPC1.24 FPC1.25 FPC1.26 FPC1.27 FPC1.28 FPC1.29 FPC1.30 FPC1.31 FPC1.33 FPC1.35 FPC1.36 FPC1.37 FPC1.38 FPC1.39 FPC1.40 FPC1.41 FPC1.42 FPC1.44 FPC1.45 FPC1.46 FPC1.48 FPC1.50 FPC1.51 FPC1.52 FPC1.53 FPC1.55 FPC1.57 FPC1.59 FPC1.61 FPC1.63 FPC1.65 FPC1.67 FPC1.68 FPC1.69 FPC1.70 FPC1.71 FPC1.72 FPC1.73 FPC1.74 FPC1.75 FPC1.76 FPC1.77 Q1.1 Q1.8 U1.4 U4.9 U6.14 U7.14 USB.2 USB.3 USB.5 USB.6 USB.7 USBC. USBC.A6 USBC.A7 USBC.A8 USBC.B6 USBC.B7 USBC.B8

## Polygon pours and split planes (outlines as drawn)
GND on Bottom Layer (solid): 1596.46,1558.25 1596.39,1538.18 1596.46,1558.25
GND on Bottom Layer (solid): 1569.35,4465 3924.35,4465 3384.35,4225 3389.35,1935 3079.35,1695 1594.35,1665 1524.35,1735
U6_6 on Top Layer (solid): 2259.35,3815 2259.35,3700 2474.35,3700 2474.35,3710 2524.35,3745 2529.35,3745 2609.35,3745 2609.35,3780 2559.35,3780 2524.35,3780 2474.35,3810 2469.35,3815 2449.35,3815 2419.35,3815 2414.35,3815 2389.35,3815 2359.35,3815 2349.35,3815 2344.35,3815
U6_8 on Top Layer (solid): 2574.35,3665 2604.35,3665 2604.35,3630 2544.35,3630 2519.35,3580 2414.35,3475 2249.35,3475 2249.35,3585 2424.35,3585 2459.35,3630 2484.35,3665 2489.35,3665 2604.35,3665
VBAT on Top Layer (solid): 2614.35,3660 2644.35,3660 2664.35,3660 2664.35,3635 2644.35,3635 2644.35,3605 2709.35,3605 2709.35,3570 2599.35,3570 2599.35,3605 2614.35,3605 2614.35,3660
+3V3 on Top Layer (solid): 2614.35,3750 2644.35,3750 2644.35,3785 2644.35,3805 2644.35,3840 2634.35,3850 2574.35,3850 2574.35,3810 2614.35,3810 2614.35,3750
GND on Top Layer (solid): 2494.35,3790 2494.35,3825 2364.35,3825 2359.35,3825 2359.35,3830 2359.35,3945 2544.35,3945 2544.35,3790 2494.35,3790
GND on Top Layer (solid): 2579.35,3555 2724.35,3555 2729.35,3550 2729.35,3445 2579.35,3445
VBAT on Top Layer (solid): 2624.35,2930 2674.35,2930 2674.35,2965 2684.35,2980 2694.35,2990 2694.35,3025 2584.35,3025 2584.35,2990 2614.35,2975 2624.35,2965 2624.35,2930
USB_5V on Top Layer (solid): 2019.35,2705 2069.35,2705 2099.35,2705 2104.35,2710 2104.35,2745 2119.35,2745 2119.35,2715 2119.35,2695 2114.35,2685 2019.35,2685 2019.35,2705
USB_5V on Top Layer (solid): 2014.35,2895 2069.35,2895 2069.35,2870 2014.35,2870
VBAT on Top Layer (solid): 2459.35,2595 2514.35,2595 2519.35,2600 2519.35,2605 2519.35,2715 2509.35,2715 2469.35,2715 2459.35,2705 2449.35,2690 2449.35,2605 2449.35,2600 2454.35,2595 2459.35,2595
+5V on Top Layer (solid): 2854.35,2230 2854.35,2200 2949.35,2200 2954.35,2205 2954.35,2230 2854.35,2230
+5V on Top Layer (solid): 2854.35,2230 2954.35,2230 2954.35,2240 2914.35,2280 2884.35,2280 2854.35,2245 2854.35,2240
U7_8 on Top Layer (solid): 2684.35,2955 2684.35,2925 2714.35,2925 2814.35,3035 2819.35,3035 2954.35,3035 2954.35,3130 2814.35,3130 2814.35,3125 2814.35,3130 2774.35,3095 2729.35,3055 2729.35,3000 2689.35,2955 2684.35,2955 2684.35,2925
U7_6 on Top Layer (solid): 2684.35,2840 2684.35,2815 2714.35,2815 2724.35,2810 2814.35,2810 2819.35,2810 2824.35,2810 2884.35,2810 2954.35,2810 2954.35,2905 2814.35,2905 2789.35,2880 2754.35,2840 2714.35,2840 2684.35,2840
C3_2 on Top Layer (solid): 2714.35,2605 2709.35,2600 2709.35,2500 2744.35,2500 2744.35,2605
C3_1 on Top Layer (solid): 2669.35,2465 2669.35,2410 2674.35,2410 2709.35,2410 2709.35,2465 2689.35,2485 2689.35,2495 2689.35,2530 2654.35,2530 2654.35,2500 2669.35,2485 2669.35,2470 2669.35,2410
P+ on Top Layer (solid): 2909.35,2030 2909.35,2005 2939.35,2005 2939.35,2030 2909.35,2030
VBAT on Top Layer (solid): 2499.35,2420 2624.35,2420 2629.35,2425 2629.35,2550 2639.35,2560 2644.35,2565 2684.35,2565 2689.35,2570 2689.35,2605 2684.35,2610 2679.35,2610 2654.35,2610 2649.35,2605 2499.35,2605
+5V on Top Layer (solid): 2644.35,2840 2644.35,2815 2674.35,2815 2674.35,2840
U7_3 on Top Layer (solid): 2604.35,2745 2689.35,2745 2689.35,2715 2604.35,2715
R3_1 on Top Layer (solid): 2334.35,2900 2334.35,2745 2364.35,2745 2364.35,2900
STDB_1 on Top Layer (solid): 2404.35,2900 2404.35,2745 2434.35,2745 2434.35,2900
C9_2 on Top Layer (solid): 2154.35,2630 2259.35,2630 2289.35,2630 2299.35,2640 2324.35,2640 2324.35,2595 2154.35,2595
C9_2 on Top Layer (solid): 2339.35,2965 2434.35,2965 2434.35,2935 2429.35,2940 2334.35,2940
+5V on Top Layer (solid): 2724.35,2745 2724.35,2710 2834.35,2710 2834.35,2745 2724.35,2745
VBAT on Top Layer (solid): 2634.35,3600 2539.35,3600 2534.35,3590 2534.35,3575 2489.35,3530 2449.35,3490 2449.35,3435 2474.35,3410 2549.35,3410 2569.35,3435 2569.35,3560 2574.35,3565 2584.35,3575 2634.35,3575
GND on Top Layer (solid): 1689.35,1500 1554.35,4465 3774.35,4465 3384.35,4225 3389.35,1935 3102.72,1770 1959.35,1770 1689.35,1500

## Silkscreen, mask and mechanical layers (free items; w line width, h text height)
Top Overlay:
  lines w10 net S$22309: 2744.35,4160 2744.35,3200 4699.35,3200 4699.35,4160 2749.35,4160
  lines w10 net S$22319: 3121.85,3165 3121.85,1985 4701.85,1985 4701.85,3165 3126.85,3165
  text "GND" at 2247.76,3905 h33.19 r270
  text "3V3" at 1945.94,3815 h33.19 r90
  text "5V" at 2984.35,2743.41 h33.19
  text "RX" at 2902.76,2615 h33.19 r270
  text "TX" at 2902.76,2520 h33.19 r270
  text "GND" at 2969.35,2273.41 h33.19
  text "IN+" at 2134.35,1949.68 h40.63
  text "IN-" at 2284.35,1949.68 h40.63
  text "B+" at 2554.35,1949.68 h40.63
  text "B-" at 2679.35,1949.68 h40.63